# EAGLE board ntpi_adapter_v1_led (EAGLE 6.4)
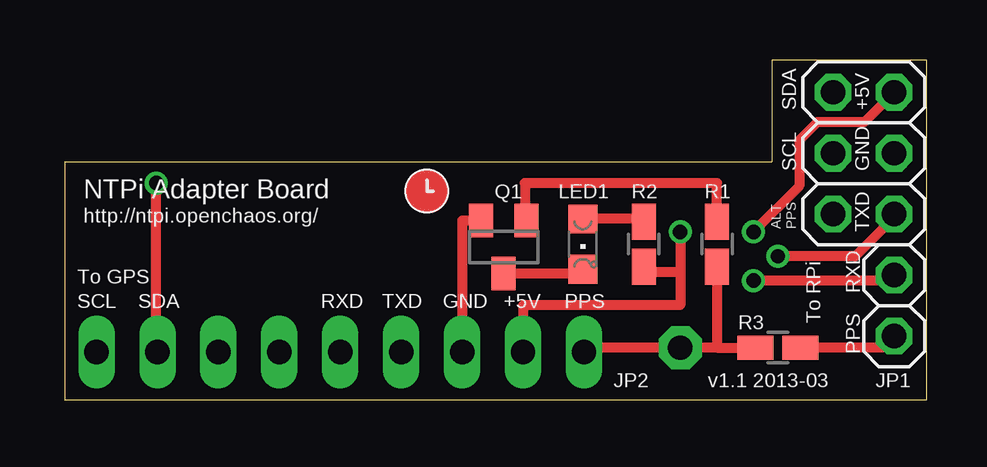
[diagram p0: board, top side]
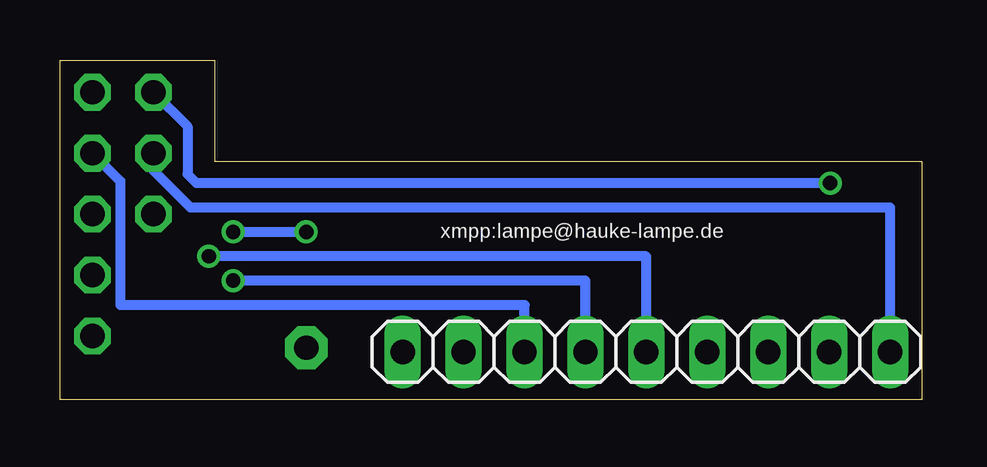
[diagram p1: board, bottom side, seen from below]

Size 35.92 x 14.15 mm. Coordinates in mm from the lower left corner, seen from the top.
Outline: 0,0 35.92,0 35.92,14.15 29.46,14.15 29.46,9.91 0,9.91 0,0
Copper layers (1*16): Top 0.0356mm / dielectric 1.5011mm / Bottom 0.0356mm
Design rules "LaenPCBOrder *": minimum track width 6mil, minimum drill 13mil, track to track 6mil, track to pad 6mil, pad to pad 6mil, via to via 6mil, smd to smd 6mil, copper to edge 15mil, drill to drill 6mil, minimum pad ring 7mil, minimum via ring 7mil, stop-mask expansion 4mil, vias tented up to drill 50mil, thermal gap 10mil

## Footprints (pad centres in the part's own frame; a part is rotated, then mirrored left to right if it is on the bottom)
PINHEAD-NTPI = drill 1.016 octagon: 1 -5.08,-1.27; 2 -5.08,1.27; 3 -2.54,-1.27; 4 -2.54,1.27; 5 0,-1.27; 6 0,1.27; 8 2.54,1.27; 10 5.08,1.27
1X09 = drill 1.016 long: 1 -10.16,0; 2 -7.62,0; 3 -5.08,0; 4 -2.54,0; 5 0,0; 6 2.54,0; 7 5.08,0; 8 7.62,0; 9 10.16,0
CHIPLED_0805 = smd 1.2 x 1.2: A 0,-1.05; C 0,1.05
SOT23 = smd 1 x 1.4: 1 -0.95,-1.1; 2 0.95,-1.1; 3 0,1.1
R0805W = smd 1.5 x 1: 1 -0.94,0; 2 0.94,0

## Placement (x,y rotation side)
JP1  [PINHEAD-NTPI]  33.3,7.72 270 top
JP2  [1X09]  11.48,1.98 0 bottom
LED1  [CHIPLED_0805]  21.59,6.48 180 top
Q1  BC849C  [SOT23]  18.29,6.36 180 top
R1  1M  [R0805W]  27.18,6.48 270 top
R2  220  [R0805W]  24.13,6.48 270 top
R3  0  [R0805W]  29.72,2.16 0 top

## Library data of the parts
JP1 = frell2
JP2 = pinhead
LED1 = led
Q1 = transistor-npn
R1-R3 = resistor

## Nets
+5V: JP1.2 JP2.2 R2.2
GND: JP1.4 JP2.3 Q1.2
GPS-RX: JP1.6 JP2.5
GPS-TX: JP1.8 JP2.4
N$1: JP1.10 R3.2
N$2: LED1.A R2.1
N$3: LED1.C Q1.3
N$4: Q1.1 R1.1
PPS: JP2.1 R1.2 R3.1
SCL: JP1.3 JP2.9
SDA: JP1.1 JP2.8

## Tracks (layer width: path | path; a pad name or v marks a point on that pad's centre or on a via)
+5V  (via drill 0.6)
  Top 0.406: JP2.2 19.1,3.94 25.65,3.94 25.65,5.33 | v25.65,6.99 25.65,5.33 | JP1.2 33.32,11.56 31.37,11.56 30.61,10.79 30.61,8.89 v28.7,6.99 | R2.2 24.13,5.33 25.65,5.33
  Bottom 0.406: v28.7,6.99 v25.65,6.99
GND
  Top 0.406: JP2.3 16.56,7.46 Q1.2
  Bottom 0.406: JP2.3 16.56,3.94 33.4,3.94 33.4,9.1 JP1.4
GPS-RX  (via drill 0.6)
  Top 0.406: v29.72,5.97 32.94,5.97 34.57,7.6 JP1.6
  Bottom 0.406: JP2.5 11.48,5.97 v29.72,5.97
GPS-TX  (via drill 0.6)
  Top 0.406: JP1.8 34.57,4.95 v28.7,4.95
  Bottom 0.406: JP2.4 14.02,4.95 v28.7,4.95
N$1
  Top 0.406: JP1.10 34.08,2.16 R3.2
N$2
  Top 0.406: R2.1 24.13,7.53 LED1.A
N$3
  Top 0.406: Q1.3 21.59,5.25 LED1.C
N$4
  Top 0.406: R1.1 27.18,9.02 19.18,9.02 19.18,7.46 Q1.1
PPS  (via drill 1.02 pad 1.78)
  Top 0.406: 27.18,2.16 v25.65,2.16 21.81,2.16 JP2.1 | 27.18,2.16 R3.1 | R1.2 27.18,2.16
SCL
  Bottom 0.406: JP2.9 1.32,8 30.48,8 32.03,9.55 JP1.3
SDA  (via drill 0.6)
  Top 0.406: JP2.8 3.81,2.03 v3.81,9.02
  Bottom 0.406: v3.81,9.02 30.23,9.02 30.61,9.4 30.61,11.38 JP1.1
(copper drawn outside any net)
  shapes: Top circle x1

## Text on the board
tNames: SDA | +5V | SCL | GND | NTPi Adapter Board | http://ntpi.openchaos.org/ | ALT | PPS | TXD | To GPS | SCL | SDA | RXD | TXD | GND | +5V | PPS | RXD | To RPi | PPS | v1.1 2013-03
bNames: xmpp:lampe@hauke-lampe.de